# EAGLE board ASD2614 (EAGLE 6.3)
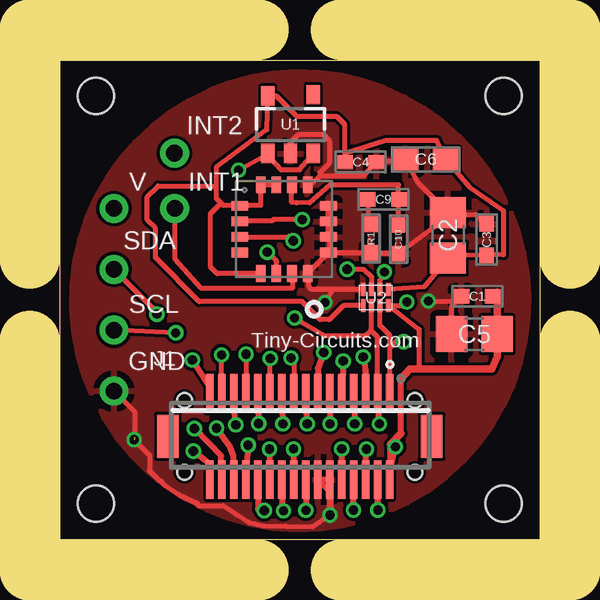
[diagram p0: board, top side]
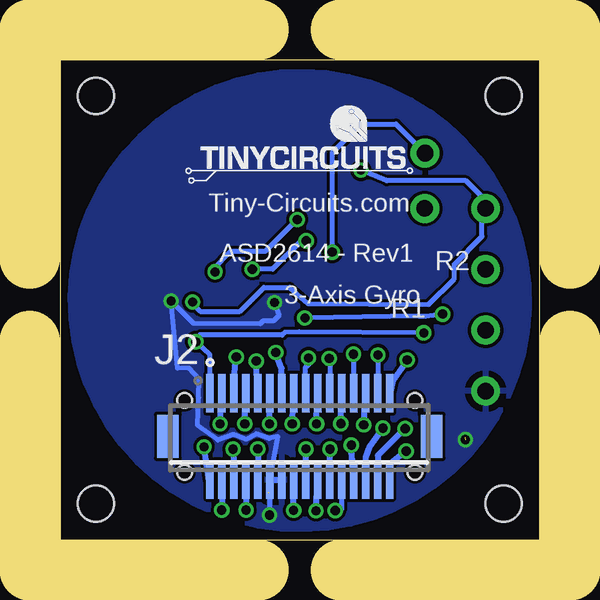
[diagram p1: board, bottom side, seen from below]

Size 20 x 20 mm. Coordinates in mm from the lower left corner, seen from the top.
Outline: 0,20 20,20 20,0 0,0 0,20
Copper layers (1*16): Top 0.035mm / dielectric 1.5mm / Bottom 0.035mm
Design rules "default *": minimum track width 5mil, minimum drill 15mil, track to track 5mil, track to pad 5mil, pad to pad 5mil, via to via 6mil, smd to smd 5mil, copper to edge 6mil, drill to drill 8mil, minimum pad ring 10mil, minimum via ring 5mil, stop-mask expansion 4mil, vias tented up to drill 25mil, thermal gap 10mil
Holes 1.5 mm at 1.5,18.5 18.5,18.5 18.5,1.5 1.5,1.5
Milling: 8 lines

## Footprints (pad centres in the part's own frame; a part is rotated, then mirrored left to right if it is on the bottom)
C0402 = smd 0.65 x 0.6: 1 -0.65,0; 2 0.65,0
C0805 = smd 1.3 x 1.5: 1 -0.95,0; 2 0.95,0
C0603 = smd 1.1 x 1: 1 -0.85,0; 2 0.85,0
0402 = smd 0.65 x 0.55: 1 -0.6,0; 2 0.6,0
DF12-32-DP = smd 0.3 x 1.6: 1 -3.75,-1.8; 2 -3.75,1.8; 3 -3.25,-1.8; 4 -3.25,1.8; 5 -2.75,-1.8; 6 -2.75,1.8; 7 -2.25,-1.8; 8 -2.25,1.8; 9 -1.75,-1.8; 10 -1.75,1.8; 11 -1.25,-1.8; 12 -1.25,1.8; 13 -0.75,-1.8; 14 -0.75,1.8; 15 -0.25,-1.8; 16 -0.25,1.8; 17 0.25,-1.8; 18 0.25,1.8; 19 0.75,-1.8; 20 0.75,1.8; 21 1.25,-1.8; 22 1.25,1.8; 23 1.75,-1.8; 24 1.75,1.8; 25 2.25,-1.8; 26 2.25,1.8; 27 2.75,-1.8; 28 2.75,1.8; 29 3.25,-1.8; 30 3.25,1.8; 31 3.75,-1.8; 32 3.75,1.8 | smd 0.9 x 1.8: F1 -5.5,0; F2 5.5,0 | hole 0.6: -4.8,1.5; 4.8,1.5
DF12-32-DS = smd 0.3 x 1.6: 1 -3.75,1.8; 2 -3.75,-1.8; 3 -3.25,1.8; 4 -3.25,-1.8; 5 -2.75,1.8; 6 -2.75,-1.8; 7 -2.25,1.8; 8 -2.25,-1.8; 9 -1.75,1.8; 10 -1.75,-1.8; 11 -1.25,1.8; 12 -1.25,-1.8; 13 -0.75,1.8; 14 -0.75,-1.8; 15 -0.25,1.8; 16 -0.25,-1.8; 17 0.25,1.8; 18 0.25,-1.8; 19 0.75,1.8; 20 0.75,-1.8; 21 1.25,1.8; 22 1.25,-1.8; 23 1.75,1.8; 24 1.75,-1.8; 25 2.25,1.8; 26 2.25,-1.8; 27 2.75,1.8; 28 2.75,-1.8; 29 3.25,1.8; 30 3.25,-1.8; 31 3.75,1.8; 32 3.75,-1.8 | smd 0.9 x 1.8: F1 -5.5,0; F2 5.5,0 | hole 0.6: -4.8,1.5; 4.8,1.5
1X.1" = drill 0.7 pad 1.016: 1 0,0
SOT-25 = smd 0.55 x 0.8: 1 -0.95,-1.2; 2 0,-1.2; 3 0.95,-1.2; 4 0.95,1.25; 5 -0.95,1.2
DQE(R-PX2SON-N8) = smd 0.2 x 0.53: 1 -0.525,-0.335; 2 -0.175,-0.335; 3 0.175,-0.335; 4 0.525,-0.335; 5 0.525,0.335; 6 0.175,0.335; 7 -0.175,0.335; 8 -0.525,0.335
L3G4200D = smd 0.7 x 0.4: 1 -1.85,0.975; 2 -1.85,0.325; 3 -1.85,-0.325; 4 -1.85,-0.975; 9 1.85,-0.975; 10 1.85,-0.325; 11 1.85,0.325; 12 1.85,0.975 | smd 0.4 x 0.7: 5 -0.975,-1.85; 6 -0.325,-1.85; 7 0.325,-1.85; 8 0.975,-1.85; 13 0.975,1.85; 14 0.325,1.85; 15 -0.325,1.85; 16 -0.975,1.85

## Placement (x,y rotation side)
C1  0.1uF  [C0402]  17.4,10.14 180 top
C2  10uF  [C0805]  16.19,12.69 90 top
C3  0.1uF  [C0402]  17.79,12.51 90 top
C4  0.1uF  [C0402]  12.54,15.74 0 top
C5  10uF  [C0805]  17.28,8.57 180 top
C6  10uF  [C0603]  15.25,15.85 180 top
C9  0.47uF  [C0402]  13.49,14.19 180 top
C10  10nF  [0402]  14.12,12.52 270 top
J1  DF12-32-DP  [DF12-32-DP]  10,4.3 180 top
J2  DF12-32-DS  [DF12-32-DS]  10,4.3 0 bottom
J3  PIN_1X.1"  [1X.1"]  2.25,13.81 0 top
J4  PIN_1X.1"  [1X.1"]  2.25,11.27 0 top
J5  PIN_1X.1"  [1X.1"]  2.25,8.73 0 top
J6  PIN_1X.1"  [1X.1"]  2.25,6.19 0 top
J7  PIN_1X.1"  [1X.1"]  4.79,13.81 0 top
J8  PIN_1X.1"  [1X.1"]  4.77,16.11 0 top
R1  10.0K  [0402]  12.98,12.55 270 top
U1  XC6210B33  [SOT-25]  9.61,17.3 0 top
U2  TX0102  [DQE(R-PX2SON-N8)]  13.17,10.1 180 top
U4  L3G4200D  [L3G4200D]  9.35,12.94 0 top
U$1  [DOCFIELD-TINYCIRCUITS-PCB]  33.91,-10 0 top  (outside the outline)

## Library data of the parts
C1 C3 = tinycircuits; DATABASE: ./../../../../../Components/TinyCircuits_Part_Database.txt; PARTNO: AS-ITM-00008
C2 = tinycircuits; DATABASE: ./../../../../../Components/TinyCircuits_Part_Database.txt; PARTNO: AS-ITM-00045
C4 = tinycircuits; PARTNO: AS-ITM-00008
C5 = tinycircuits; PARTNO: AS-ITM-00045
C6 = tinycircuits; PARTNO: AS-ITM-00002
C9 J3 = tinycircuits
C10 = tinycircuits; PARTNO: AS-ITM-00084; VALUE: C1005X7R1E103K050BB
J1 = tinycircuits; PARTNO: AS-ITM-00015
J2 = tinycircuits; PARTNO: AS-ITM-00012
J4-J8 = tinycircuits; DATABASE: ./../../../../../Components/TinyCircuits_Part_Database.txt
R1 = tinycircuits; PARTNO: AS-ITM-00032
U1 = tinycircuits; PARTNO: AS-ITM-00046
U2 = tinycircuits; PARTNO: AS-ITM-00073; VALUE: TXS0102
U4 = tinycircuits; PARTNO: AS-ITM-00089
U$1 = tinycircuits; NO_BOM: TRUE

## Nets
+3V3: J1.6 J2.6
+5V: J1.8 J2.8
AD0: J1.11 J2.11
AD1: J1.9 J2.9
AD2: J1.7 J2.7
AD3: J1.5 J2.5
AD4/SDA: J1.3 J2.3 J4.1 U2.6
AD5/SCL: J1.1 J2.1 J5.1 U2.7
AREF: J1.13 J2.13
GND: C1.2 C2.2 C3.2 C4.2 C5.2 C6.2 C10.2 J1.12 J1.14 J2.12 J2.14 J6.1 R1.2 U1.2 U2.4 U4.8 U4.9 U4.10 U4.11 U4.12 U4.13
INT1: J7.1 U4.7
INT2: J8.1 U4.6
IO0: J1.24 J2.24
IO1: J1.26 J2.26
IO2: J1.28 J2.28
IO3: J1.30 J2.30
IO4: J1.32 J2.32
IO5: J1.31 J2.31
IO6: J1.29 J2.29
IO7: J1.27 J2.27
IO8: J1.25 J2.25
IO9: J1.23 J2.23
MISO: J1.17 J2.17
MOSI: J1.19 J2.19
N$1: C9.2 R1.1
N$2: C9.1 C10.1 U4.14
RESET: J1.22 J2.22
RSV0: J1.20 J2.20
RSV1: J1.18 J2.18
RSV2: J1.16 J2.16
SCK: J1.15 J2.15
SCL_3V3: U2.2 U4.2
SDA_3V3: U2.3 U4.3
SS: J1.21 J2.21
VBATT: J1.4 J2.4
VCC: C1.1 C5.1 J1.2 J2.2 J3.1 U1.1 U1.3 U2.8
VCC_3V3: C2.1 C3.1 C4.1 C6.1 U1.5 U2.1 U2.5 U4.1 U4.5 U4.15 U4.16
VIN: J1.10 J2.10

## Tracks (layer width: path | path; a pad name or v marks a point on that pad's centre or on a via)
+3V3  (via drill 0.38)
  Top 0.254: J2.6 12.75,3.77 v12.78,3.77
  Bottom 0.254: v12.78,3.77 12.74,2.51 J2.6
+5V  (via drill 0.38)
  Top 0.254: v12.24,1.23 J2.8
  Bottom 0.254: J2.8 12.25,1.21 v12.24,1.23
AD0  (via drill 0.38)
  Top 0.254: v11.26,4.83 11.29,5.04 J2.11
  Bottom 0.254: J2.11 11.28,5.79 v11.26,4.83
AD1  (via drill 0.38)
  Top 0.254: J2.9 11.79,6.27 v11.81,7.44
  Bottom 0.254: v11.81,7.44 11.78,6.22 J2.9
AD2  (via drill 0.38)
  Top 0.254: v12.29,4.83 12.31,5.05 J2.7
  Bottom 0.254: J2.7 12.27,5.86 v12.29,4.83
AD3  (via drill 0.38)
  Top 0.254: J2.5 12.73,7.04 v12.65,7.61
  Bottom 0.254: v12.65,7.61 12.78,6.3 J2.5
AD4/SDA  (via drill 0.38)
  Top 0.203: J2.3 13.24,8.44 12.96,8.72 | 12.96,8.72 12.99,8.85 12.99,9.73 U2.6 | v9.79,9.24 10.98,8.53 11.01,8.5 12.75,8.5 12.96,8.72 | v4.04,9.4 4.11,9.41 J4.1
  Top 0.254: v13.32,4.82 13.31,5 J2.3
  Bottom 0.203: v9.79,9.24 5.02,9.31 4.75,9.31 v4.04,9.4
  Bottom 0.254: J2.3 13.28,5.86 v13.32,4.82
AD5/SCL  (via drill 0.38)
  Top 0.203: J2.1 13.75,8.01 | 13.75,8.01 13.75,8.52 13.34,8.92 U2.7 | v14.33,8.25 14.08,8.34 13.75,8.01 | v4.83,8.62 2.23,8.74 J5.1
  Bottom 0.203: v4.83,8.62 10.02,8.66 10.62,8.64 10.74,8.53 14.19,8.53 v14.33,8.25 | 14.43,8.39 v14.33,8.25 | J2.1 13.75,7.7 v14.33,8.25
AREF  (via drill 0.38)
  Top 0.254: J2.13 10.75,7.15 v11,7.8
  Bottom 0.254: v11,7.8 10.76,7.14 J2.13
GND  (via drill 0.38)  (2 unrouted)
  Top 0.203: C5.2 16.33,9.73 C1.2 16.53,9.92 v15.36,9.95 | J2.12 v11.26,1.02 10.52,0.54 9.42,0.56 8.5,0.57 7.87,0.72 7.36,1.04 6.82,1.41 5.77,1.41 5.74,1.44 5.74,1.51 4.98,1.87 4.37,2.27 4.17,2.47 4.13,2.47 3.73,2.87 3.73,3.52 v3.09,4.16 | J6.1 3.11,5.33 3.11,4.26 3.22,4.15 3.22,4.09 | 11.3,1.95 11.3,1.14 11.29,1.13 11.29,1.09 | J2.14 11.27,1.97 11.27,1.93 11.22,1.87 11.22,0.86 11.28,0.92 11.28,1.03 11.3,1.01 11.37,1.01 | U2.4 11.39,10.43 | 11.39,10.43 v11.05,9.88 | C3.2 17.74,13.15 17.36,13.54 16.29,13.54 | 16.29,13.54 C2.2 14.93,14.89 C6.2 C4.2 12.68,15.18 10.84,15.18 | 11.28,11.95 R1.2 13,11.92 C10.2 16.29,13.54 | 11.28,11.95 11.16,11.95 | U1.2 9.61,16.55 9.97,16.91 10.96,16.91 11.23,16.63 11.23,15.7 10.86,15.33 10.86,15.23 10.84,15.18 | 11.39,10.43 10.49,10.43 10.38,10.54 10.38,11.06 | 10.38,11.06 10.38,11.18 | U4.13 10.46,14.79 10.84,15.18 | 11.26,11.97 U4.9 U4.8 10.35,11.09 10.38,11.06 | 11.26,11.97 11.28,11.95 | 11.26,11.97 11.26,12.56 U4.10 U4.11 U4.12
  Top 0.254: J2.12 J2.14
  Bottom 0.203: v11.26,1.02 11.25,1.21 J2.12 10.92,4.3 11.28,4.22 11.81,4.41 12.23,4.18 12.77,4.38 13.41,4.15 14.25,4.77 14.22,5.92 14.21,6.71 14.61,7.15 15.1,7.14 v15.36,9.95 14.43,9.01 11.65,8.99 11.52,9.12 11.09,9.12 10.87,9.34 v11.05,9.88
  Bottom 0.254: J2.12 J2.14
  pour Top: 18.49,5.61 arc180 1.54,14.32 arc180
  pour Bottom: 18.49,5.61 arc180 1.5,14.34 arc180
INT1
  Top 0.203: J7.1 4.79,11.7 5.87,10.49 9.71,10.49 9.7,11.03 | 9.7,11.03 9.7,11.21 | U4.7 9.68,11.05 9.7,11.03
INT2  (via drill 0.38)
  Top 0.203: v8.64,11.98 9.04,11.58 9.03,11.57 U4.6
  Bottom 0.203: v8.64,11.98 8.64,16.14 7.45,17.33 5.99,17.33 J8.1
IO0  (via drill 0.38)
  Top 0.254: J2.24 8.25,1.26 v8.52,1.21
  Bottom 0.203: v8.52,1.21 8.48,1.27 8.25,1.27 J2.24
  Bottom 0.254: J2.24
IO1  (via drill 0.38)
  Top 0.254: v7.85,3.94 J2.26
  Bottom 0.254: 7.85,3.66 J2.26 v7.85,3.94
IO2  (via drill 0.38)
  Top 0.254: v6.53,4.64 7.07,3.89 7.22,3.49 7.29,2.61 7.26,2.51 J2.28
  Bottom 0.254: J2.28 7.24,3.43 7.07,3.88 v6.53,4.64
IO3  (via drill 0.38)
  Top 0.254: J2.30 6.73,3.49 v5.61,4.63
  Bottom 0.254: v5.61,4.63 6.75,3.51 6.77,2.53 J2.30
IO4  (via drill 0.38)
  Top 0.254: J2.32 6.25,3.14 v5.56,3.69
  Bottom 0.254: v5.56,3.69 5.61,3.65 6.21,3.18 6.21,3.14 6.26,3.1 J2.32
IO5  (via drill 0.38)
  Top 0.254: v5.52,7.49 6.23,6.38 J2.31
  Bottom 0.254: J2.31 6.11,6.64 v5.52,7.49
IO6  (via drill 0.38)
  Top 0.203: J2.29 6.75,7.75 6.74,7.76 6.73,7.78 v6.74,7.7
  Top 0.254: J2.29
  Bottom 0.203: v6.74,7.7 6.74,6.11 J2.29
IO7  (via drill 0.38)
  Top 0.254: v7.33,4.78 7.31,4.9 J2.27
  Bottom 0.254: J2.27 7.29,5.76 v7.33,4.78
IO8  (via drill 0.38)
  Top 0.203: v7.76,7.73 7.76,6.11 J2.25
  Bottom 0.203: J2.25 v7.75,7.72 v7.76,7.73
IO9  (via drill 0.38)
  Top 0.254: v8.29,4.83 8.31,4.98 J2.23
  Bottom 0.254: J2.23 8.28,5.59 v8.29,4.83
MISO  (via drill 0.38)
  Top 0.203: v9.63,7.58 9.75,7.46 J2.17
  Bottom 0.203: J2.17 9.76,6.11 9.76,7.17 9.63,7.3 v9.63,7.58
MOSI  (via drill 0.38)
  Top 0.254: v9.3,4.83 9.31,4.95 J2.19
  Bottom 0.254: J2.19 9.27,5.76 v9.3,4.83
N$1
  Top 0.203: C9.2 12.84,13.29 R1.1
N$2
  Top 0.203: C10.1 14.12,14.27 | 14.12,14.27 C9.1 | 14.12,14.27 14.12,14.8 14.02,14.79 11.26,14.78 10.41,14.04 9.87,14.04 9.86,14.04 9.66,14.06 9.66,14.05 9.66,14.79 U4.14
RESET  (via drill 0.38)
  Top 0.254: v8.74,3.77 J2.22
  Bottom 0.254: J2.22 8.75,3.69 v8.74,3.77
RSV0  (via drill 0.38)
  Top 0.254: J2.20 9.25,1.2 v9.32,1.2
  Bottom 0.254: v9.32,1.2 J2.20
RSV1  (via drill 0.38)
  Top 0.254: v9.74,3.77 9.74,2.51 J2.18
  Bottom 0.254: J2.18 9.75,3.72 v9.74,3.77
RSV2  (via drill 0.38)
  Top 0.254: J2.16 10.25,1.16 v10.25,1.22
  Bottom 0.254: v10.25,1.22 J2.16
SCK  (via drill 0.38)
  Top 0.254: v10.31,4.83 10.31,4.98 J2.15
  Bottom 0.254: J2.15 10.29,5.66 v10.31,4.83
SCL_3V3  (via drill 0.38)
  Top 0.203: U2.2 13.34,10.81 v13.53,11.16 | v10.11,13.35 8.91,13.35 8.84,13.29 7.62,13.29 U4.2
  Bottom 0.203: v13.53,11.16 13.62,11.26 12.86,12.02 11.43,12.02 v10.11,13.35
SDA_3V3  (via drill 0.38)
  Top 0.203: 9.54,12.64 v9.73,12.46 9.57,12.62 U4.3 | v11.98,11.27 12.65,11.27 12.99,10.97 12.99,10.46 U2.3
  Bottom 0.203: v9.73,12.46 9.95,12.46 11.14,11.27 v11.98,11.27
SS  (via drill 0.38)
  Top 0.203: J2.21 8.77,6.12 v8.77,7.55
  Bottom 0.203: v8.77,7.55 8.75,7.53 J2.21
VBATT  (via drill 0.38)
  Top 0.254: v13.25,1.23 J2.4
  Bottom 0.254: J2.4 13.25,1.24 v13.25,1.23
VCC  (via drill 0.38)
  Top 0.203: C1.1 18.23,10.32 | 13.77,2.52 J2.2 13.73,2.67 v13.99,3.87 | U1.3 9.99,15.42 9.2,15.42 8.66,16.02 U1.1 8.61,16.05 v7.45,15.4 | 14.97,7.12 14.97,8.76 U2.8 14.32,9.76 v14.47,9.91
  Top 0.254: 13.77,2.52 13.77,3.97 | 14.21,4.43 14.21,6.69
  Top 0.305: 18.23,10.32 C5.1 18.23,7.64 18.02,7.12 14.97,7.12 14.59,7.12 14.21,6.69 | 13.77,3.97 14.21,4.43
  Bottom 0.203: J2.2 13.77,2.45 | v7.45,15.4 6.38,14.97 3.07,14.97 2.25,14.14 J3.1 2.4,13.66 2.4,12.64 3.56,11.48 3.56,10.87 4.63,9.81 9.66,9.84 10.42,10.51 11.5,10.51 12.49,9.52 14.15,9.52 14.47,9.84 v14.47,9.91
  Bottom 0.254: 13.77,2.45 v13.99,3.87
VCC_3V3
  Top 0.203: U2.1 15.18,10.54 C2.1 16.19,11.85 C3.1 18.5,11.88 18.49,13.72 17.08,14.7 C6.1 15.7,16.65 13.6,16.65 11.89,16.12 C4.1 11.87,15.77 11.87,17.31 11.53,17.65 9.87,17.65 9.02,18.5 U1.5 8.62,17.09 6.51,15.52 6.52,14.76 | 6.52,14.76 6.52,14.23 6.72,14.03 | 6.72,14.03 6.81,13.94 7.33,13.94 | 6.72,14.03 6.29,13.6 6.29,11.36 6.55,11.09 U4.5 | U2.5 11.83,9.76 11.24,9.17 10.85,9.17 10.1,9.93 5.81,9.93 3.98,11.75 3.98,12.98 3.64,13.32 3.64,14.3 4.09,14.75 6.5,14.75 6.52,14.76 | U4.1 7.33,13.92 7.33,13.94 | 7.33,13.94 8.38,13.94 U4.16 U4.15
VIN  (via drill 0.38)
  Top 0.254: J2.10 v11.76,3.78 v11.75,3.78
  Bottom 0.254: v11.75,3.78 J2.10

## Text on the board
tPlace: INT2 | V | INT1 | SDA | SCL | Tiny-Circuits.com | GND
bPlace: Tiny-Circuits.com | ASD2614 - Rev1 | 3-Axis Gyro
bNames: R2 | R1
Document: FABRICATION DRAWING | NOTES: | 1. PRINTED CIRCUIT BOARD MADE FROM NEMA GRADE FR-4 EPOXY LAMINATE | WITH 1 OUNCE COPPER PLATING AND .024 THICKNESS. | 2. ALL DIMENSIONS ARE GIVEN IN INCHES. | 3. CIRCUIT PATHS ARE FOR REFERENCE ONLY. | 4. HOLE SIZES SHOWN ARE FINISHED DIAMETERS AFTER PLATING. | 5. BOARD PLATED USING REFLOW OR SIMILAR METHOD. | 6. BOARD TO HAVE BLUE SOLDER MASK ON PLATED SURFACES USING WET FILM | 7. SILKSCREEN BOARD USING WHITE INK. | SR100 OR SR1010 EPOXY. EQUIVALENT WET OR DRY FILM MAY BE USED. | 8. THE FOLLOWING INFORMATION APPLIES TO THIS BOARD: | * 2 COPPER LAYERS | * .024 BOARD THICKNESS | * REQUIRES TOP SIDE SILKSCREEN | Released under the Creative Commons Attribution Share-Alike 3.0 License | http://creativecommons.org/licenses/by-sa/3.0 | Original Arduino Uno Design by Team Arduino | LilyPad Arduino Design by Leah Buechley and Sparkfun Electronics | TinyDuino, TinyLily and TinyShield Designs by TinyCircuits | TinyShield - 3-Axis Gyro | AS-PCB-ASD2614 | 1